# Altium PCB PCB_RL_TOF.PcbDoc
Units mm, origin at the board's own origin, x right, y up, seen from the top; angles counter-clockwise.
Board outline 14.73 x 3.3 mm, 2 copper layers (Top Layer, Bottom Layer); 5 components, 5 nets, 26 pads, 6 vias.
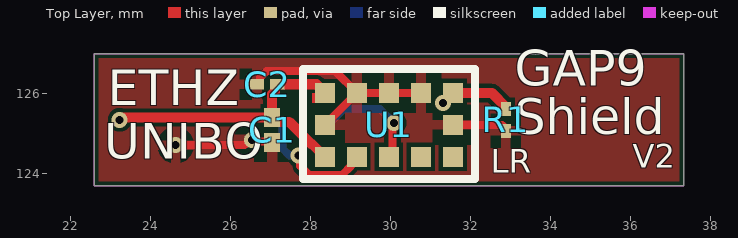
[diagram p0: Top Layer view]
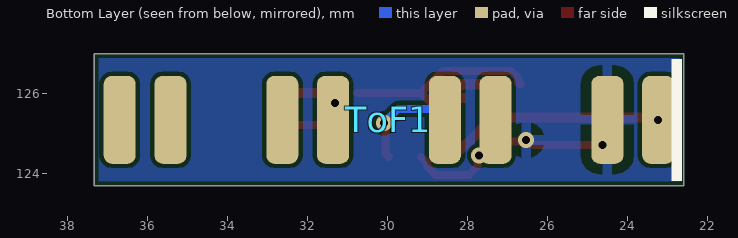
[diagram p1: Bottom Layer view, seen from below]

## Layer stack, top to bottom
Top Solder: solder mask 0.0102, Solder Resist, Dk 3.5
Top Layer: signal copper 0.0356
Dielectric 1: dielectric 0.32, FR-4, Dk 4.8
Bottom Layer: signal copper 0.0356
Bottom Solder: solder mask 0.0102, Solder Resist, Dk 3.5

## Board outline
22.606,123.698 37.338,123.698 37.338,127 22.606,127

## Design rules (kind name [scope] priority, off if disabled: settings)
Clearance [All] p1: gap=0.1 ignorepadtopadclearanceinfootprint=TRUE except(0: Arc-Hole Track-Hole SMDPad-Hole THPad-Hole Via-Hole Fill-Hole Poly-Hole Region-Hole Text-Hole)
PolygonConnect [All] p1: connectstyle=Relief reliefconductorwidth=0.254 reliefentries=4 polygonreliefangle="90 Angle" airgapwidth=0.254
RoutingVias [All] p1: holewidth=0.2 width=0.4 viastyle="Through Hole" minholewidth=0.2 minwidth=0.4 maxholewidth=0.8 maxwidth=1
SolderMaskExpansion [All] p1: expansion=0.102 istentingtop=FALSE
Width [All] p1: maxlimit=0.254 minlimit=0.1 preferedwidth=0.1 minimp=50.000000 maximp=50.000000 favimp=50.000000
30 further rules are at their usual default settings.

## Components (designator, comment, footprint, x,y, rotation, side; value= is the part's Value field where it differs from the comment)
C1 "4.7uF" FP-GRM035-0_09-IPC_B 27.051,125.095 r90 top
C2 "100nF" FP-C0603-030-0_03-IPC_C 26.924,126.238 r180 top
R1 "CRCW020110K0FNED" RESC0603X28X15LL05T05 32.893,125.349 r270 top value=10k
ToF1 "Crazyflie Expansion Left Side" TOF_RIGHT_LEFT 26.543,124.079 r180 bottom
U1 "ToF - VL53L1X" TOF 29.972,125.222 r90 top

## Footprints (in the part's own frame and the unit in brackets; to place one, negate y for a bottom-side part, rotate by r counter-clockwise, add the part's x,y. Pads: shape width x height; smd on the part's side, far side on the other; paste and mask are expansions set on the pad)
FP-C0603-030-0_03-IPC_C [mm]
  rect 0.356x0.263 smd paste+0 mask+0: 1(-0.253,0) 2(0.253,0)
  body extent -0.53,-0.27 0.53,0.27, height 0.25
FP-GRM035-0_09-IPC_B [mm]
  rect 0.477x0.403 smd paste+0 mask+0: 1(-0.313,0) 2(0.313,0)
  body extent -0.7,-0.35 0.7,0.35, height 0.25
RESC0603X28X15LL05T05 [mm] "Chip Resistor, 2-Leads, Body 0.60x0.30mm, IPC High Density"
  rect 0.35x0.25 smd: 1(-0.275,0) 2(0.275,0)
  body extent -0.33,-0.17 0.32,0.18, height 0.28
TOF [mm]
  rect 0.5x0.5 smd: 1(0.8,1.6) 2(0.8,0.8) 3(0.8,0) 4(0.8,-0.8) 5(0.8,-1.6) 6(0,-1.6) 7(-0.8,-1.6) 8(-0.8,-0.8) 9(-0.8,0) 10(-0.8,0.8) 11(-0.8,1.6) 12(0,1.6)
  Top Layer region: 0.55,1.8 0.8,1.8 0.8,1.93 0.55,1.93
  silkscreen extent -1.35,-2.15 1.4,2.15, body extent -1.35,-2.42 1.4,2.4, height 1.6
TOF_RIGHT_LEFT [mm] "1mm pitch"
  rrect50% 0.8x2.2 smd: 1(3.302,1.27) 2(2.032,1.27) 3(-0.762,1.27) 4(-2.032,1.27) 5(-4.826,1.27) 6(-6.096,1.27) 7(-8.89,1.27) 8(-10.16,1.27)

## Part data
C1: library part CMP-06035-019701-1, "Chip Multilayer Ceramic Capacitors for General Purpose, 0201, 4.7uF, X5R, 15%, 20%, 6.3V", Case Code (Imperial)=0201, Case Code (Metric)=0603, Dielectric=X5R, Max Operating Temperature=85°C, Min Operating Temperature=-55°C, Tolerance=20%, Voltage Rating=6.3V, Capacitance=4.7uF, Case/Package=0201, Length=0.024inch, Mount="Surface Mount", Packaging="Tape and Reel", Thickness=0.022inch, Voltage Rating (DC)=6.3V, Width=0.012inch
C2: library part CMP-08246-005139-1, "Multilayer Ceramic Capacitors 100nF ±10% 25V X5R SMD 0201", Case Code (Imperial)=0201, Case Code (Metric)=0603, Dielectric=X5R, Dielectric Material=Ceramic, Max Operating Temperature=85°C, Min Operating Temperature=-55°C, Package Quantity=15000, Tolerance=10%, Voltage Rating=25V, Capacitance=100nF, Case/Package=0201, Depth=0.3mm, Height=0.3mm, Lead Free="Lead Free", Length=0.6mm, Mount="Surface Mount", Packaging="Tape and Reel", REACH SVHC="No SVHC", RoHS Compliant=Yes, Series=C, Termination=SMD/SMT, Thickness=0.013inch, Voltage Rating (DC)=25V, Weight=6E-06oz, Width=0.012inch
R1: library part CMP-2004-00016-1, Manufacturer="Vishay Dale", Part Number=CRCW020110K0FNED
ToF1: library part ToF_Right_Letf, Supplier Part Number 1=110990442-ND, Supplier 1=Digi-Key
U1: library part VL53L1X, Manufacturer=STMicroelectronics, Manufacturer Part Number=VL53L1CXV0FY/1, Supplier Part Number 1=497-17764-6-ND, ComponentLink1Description=http://www.farnell.com/datasheets/2600105.pdf?src-supplier=Farnell, ComponentLink1URL=http://www.farnell.com/datasheets/2600105.pdf?src-supplier=Farnell, ComponentLink2Description=http://www.st.com/content/ccc/resource/technical/document/datasheet/group3/7d/85/c8/95/fb/3b/4e/2d/DM00452094/files/DM00452094.pdf/jcr:content/translations/en.DM00452094.pdf?src-supplier=Digi-Key, ComponentLink2URL=http://www.st.com/content/ccc/resource/technical/document/datasheet/group3/7d/85/c8/95/fb/3b/4e/2d/DM00452094/files/DM00452094.pdf/jcr:content/translations/en.DM00452094.pdf?src-supplier=Digi-Key, Pricing 1="1 = 7.07000, 10 = 6.38600, 100 = 5.28660, 500 = 4.60350, 1000 = 4.00950 (USD)", RoHS=No, Stock 1=5939, Supplier 1=Digi-Key

## Via types
v1: diameter 0.4, hole 0.2, Top Layer to Bottom Layer, tented both sides, 6 vias

## Nets (pads, with @x,y where several pads share a name; then routed paths per layer and width w, separated by ;. In a path a pad name is that pad's centre, name@x,y a point inside that pad or via, vN(x,y) a via of type N, cw(c..) or ccw(c..) an arc to the next point about the centre after c; other vN are vias at no path point)
2V8: C1.2 C2.1 ToF1.1 U1.1 U1.11 | length 7.8
  Top Layer w0.254: v1(23.241,125.349) 23.3,125.408 C1.2 ; U1.11 28.049,124.745 28.028,124.745 27.476,125.297 27.126,125.297 27.051,125.372 C1.2 ; U1.1 28.156,126.238 C2.1 27.13,126.238 27.126,126.234 27.126,126.063 27.051,125.988 C1.2
GND: C1.1 C2.2 R1.2 ToF1.2 U1.2 U1.3 U1.4 U1.6 U1.12 | length 9.6
  Top Layer w0.2: v1(24.638,124.714) 26.362,124.714 26.489,124.841 v1(26.543,124.841) 26.573,124.811 27.021,124.811 C1.1 ; C2.2 26.718,126.238 26.749,126.269 26.749,126.402 26.916,126.569 28.625,126.569 U1.2 ; U1.12 29.022,125.872 U1.2 ; U1.4 U1.3 U1.2 ; U1.6 32.795,125.222 32.893,125.124 R1.2
PULP_I2C.SCL: ToF1.3 U1.10 | length 3.2
  Top Layer w0.2: v1(27.716,124.453) 27.754,124.415 27.754,124.194 27.976,123.972 28.805,123.972 29.022,124.189 29.022,124.272 U1.10
  Bottom Layer w0.2: ToF1.3 27.305,124.637 27.489,124.453 v1(27.716,124.453)
PULP_I2C.SDA: ToF1.4 U1.9 | length 2.7
  Top Layer w0.2: U1.9 30.061,124.511 30.061,125.227 v1(30.099,125.265)
  Bottom Layer w0.2: ToF1.4 28.848,125.622 29.742,125.622 v1(30.099,125.265)
XSHUT: R1.1 ToF1.5 U1.5 | length 1.9
  Top Layer w0.254: v1(31.322,125.772) U1.5 32.541,126.022 32.893,125.67 R1.1
pads on no net: ToF1.6 ToF1.7 ToF1.8 U1.7 U1.8

## Polygon pours and split planes (outlines as drawn)
GND on Bottom Layer "NONET_L-01_P-001" (solid, pour order 0): 37.338,127 37.338,123.698 22.606,123.698 22.606,127
GND on Top Layer "NONET_L-01_P-001" (solid, pour order 1): 37.338,127 37.338,123.698 22.606,123.698 22.606,127

## Keep-outs
Keep-Out Layer:
  the board outline again, w0.01

## Silkscreen, mask and mechanical layers (free items; w line width, h text height)
Top Overlay:
  text "GAP9" at 33.118,125.899 h1.52
  text "ETHZ" at 22.941,125.409 h1.52
  text "Shield" at 33.122,124.682 h1.52
  text "UNIBO" at 22.86,124.079 h1.52
  text "V2" at 36.068,123.952 h1
  text "LR" at 32.512,123.825 h1.02
Bottom Overlay:
  rectangle: 22.648,123.823 22.902,126.871